# Altium PCB FE1.1S-PCB.PcbDoc
Units mil, origin at the board's own origin, x right, y up, seen from the top; angles counter-clockwise.
Board outline not stored, 4 copper layers (Top Layer, Internal Plane 1, Mid-Layer 1, Bottom Layer), stack 18.2 mil thick; 21 components, 0 nets, 66 pads, 0 vias.
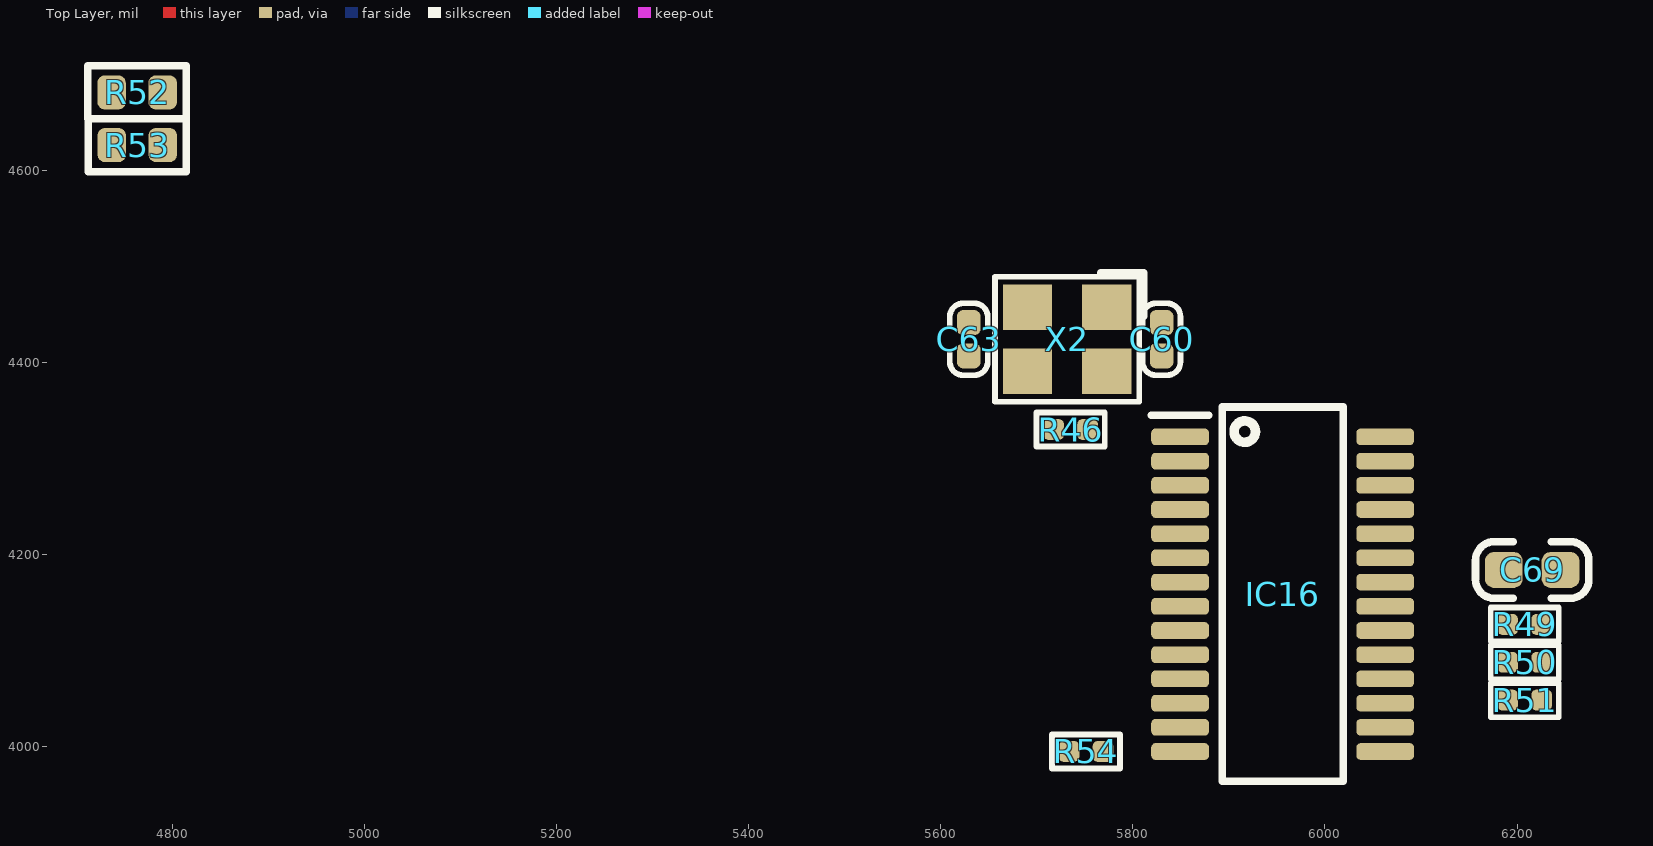
[diagram p0: Top Layer view]
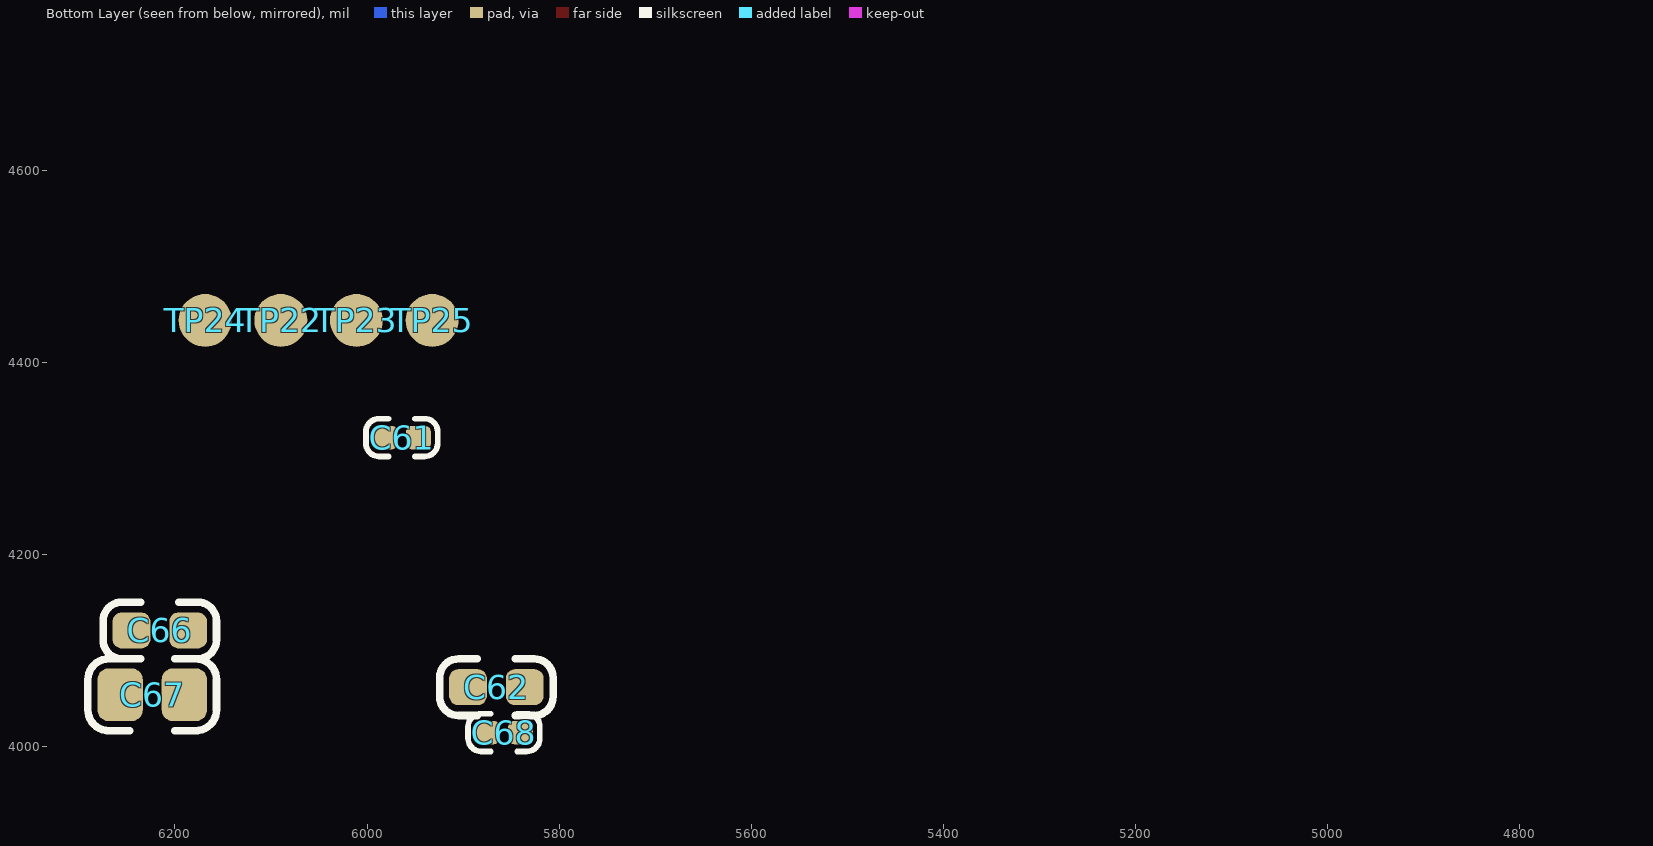
[diagram p1: Bottom Layer view, seen from below]
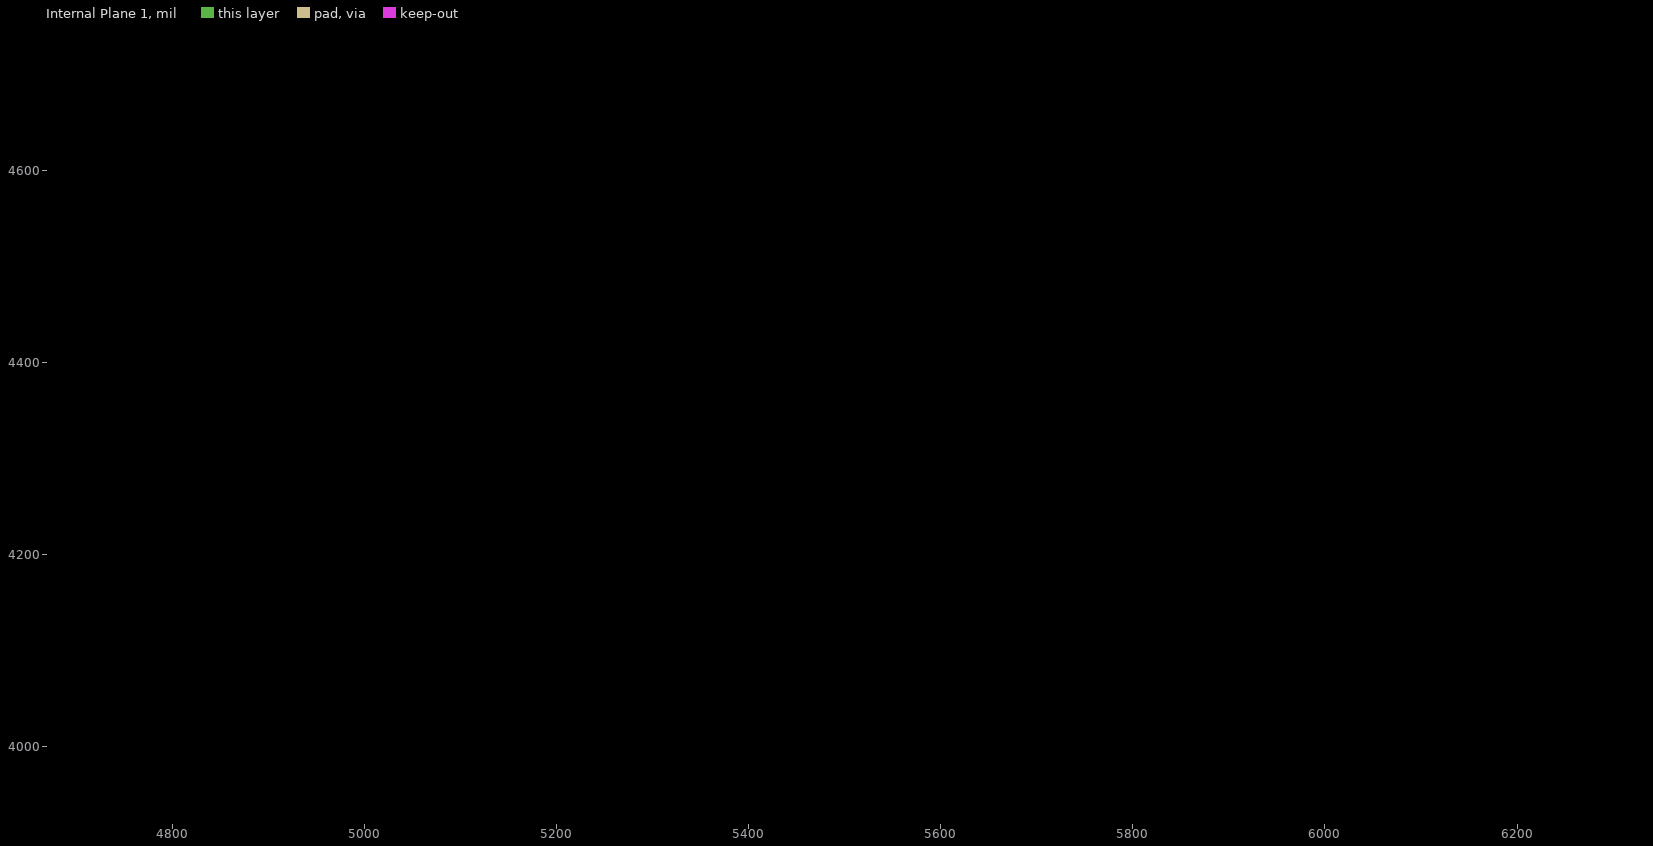
[diagram p2: Internal Plane 1, clearances drawn from the general rule]

## Layer stack, top to bottom
Top Solder: solder mask 0.4, Solder Resist, Dk 3.5
Top Layer: signal copper 1.4
Dielectric 1: dielectric 12.6, FR-4, Dk 4.8
Internal Plane 1: plane copper 1.4
Mid-Layer 1: signal copper 1.4
Bottom Layer: signal copper 1.4
Bottom Solder: solder mask 0.4, Solder Resist, Dk 3.5

## Components (designator, comment, footprint, x,y, rotation, side; value= is the part's Value field where it differs from the comment)
C60 "12pF" C_0402 5829.92,4424.41 r270 top
C61 "100nF" C_0402 5963.78,4322.05 r180 bottom
C62 "10uF" C_0603 5865.35,4062.2 r180 bottom
C63 "12pF" C_0402 5629.13,4424.41 r270 top
C66 "10uF" C_0603 6215.75,4121.26 r180 bottom
C67 "22uF" C_0805 6223.62,4054.33 r0 bottom
C68 "100nF" C_0402 5857.48,4014.96 r180 bottom
C69 "10uF" C_0603 6215.75,4184.25 r0 top
IC16 "FE1.1S" SSOP-28N-150MIL 5955.91,4158.99 r0 top
R46 "1mΩ" R_0402 5735.2,4330.45 r0 top
R49 "10kΩ" R_0402 6207.87,4127.49 r0 top
R50 "10kΩ" R_0402 6207.87,4088.12 r0 top
R51 "10kΩ" R_0402 6207.87,4048.75 r0 top
R52 "0Ω" R_0603 4763.34,4681.39 r0 top
R53 "0Ω" R_0603 4763.51,4626.56 r0 top
R54 "2.7kΩ" R_0402 5751.18,3995.28 r0 top
TP22 "TP" TP1.4mm 6089.76,4444.09 r0 bottom
TP23 "TP" TP1.4mm 6011.02,4444.09 r0 bottom
TP24 "TP" TP1.4mm 6168.5,4444.09 r0 bottom
TP25 "TP" TP1.4mm 5932.28,4444.09 r0 bottom
X2 "12Mhz/20pF" XTAL_3225-4P 5731.5,4424.41 r180 top

## Footprints (in the part's own frame and the unit in brackets; to place one, negate y for a bottom-side part, rotate by r counter-clockwise, add the part's x,y. Pads: shape width x height; smd on the part's side, far side on the other; paste and mask are expansions set on the pad)
C_0402 [mm] "Chip Capacitor, 2-Leads, Body 1.00x0.50mm, IPC Medium Density"
  rrect50% 0.66x0.62 smd: 1(-0.44,0) 2(0.44,0)
  silkscreen extent -0.95,-0.5 0.95,0.5, body extent -0.52,-0.27 0.53,0.28, height 0.55
C_0603 [mm] "Chip Capacitor, 2-Leads, Body 1.60x0.80mm, IPC Medium Density"
  rrect50% 1x0.95 smd: 1(-0.75,0) 2(0.75,0)
  silkscreen extent -1.5,-0.75 1.5,0.75, body extent -0.8,-0.4 0.8,0.4, height 0.87
C_0805 [mm] "Chip Capacitor, 2-Leads, Body 2.00x1.25mm, IPC Medium Density"
  rrect50% 1.2x1.4 smd: 1(-0.85,0) 2(0.85,0)
  silkscreen extent -1.7,-0.95 1.7,0.95, body extent -1,-0.62 1,0.63, height 0.88
R_0402 [mm] "Chip Resistor, 2-Leads, Body 1.00x0.50mm, IPC Medium Density"
  rrect50% 0.55x0.55 smd: 1(-0.45,0) 2(0.45,0)
  silkscreen extent -0.9,-0.45 0.9,0.45, body extent -0.5,-0.27 0.5,0.28, height 0.4
R_0603 [mm] "Chip Resistor, 2-Leads, Body 1.60x0.80mm, IPC Medium Density"
  rrect50% 0.75x0.9 smd: 1(-0.675,0) 2(0.675,0)
  silkscreen extent -1.3,-0.7 1.3,0.7, body extent -0.8,-0.42 0.8,0.43, height 0.6
SSOP-28N-150MIL [mm]
  rrect50% 1.525x0.44 smd: 1(-2.712,4.16) 2(-2.712,3.52) 3(-2.712,2.88) 4(-2.712,2.24) 5(-2.712,1.6) 6(-2.712,0.96) 7(-2.712,0.32) 8(-2.712,-0.32) 9(-2.712,-0.96) 10(-2.712,-1.6) 11(-2.712,-2.24) 12(-2.712,-2.88) 13(-2.712,-3.52) 14(-2.712,-4.16) 15(2.712,-4.16) 16(2.712,-3.52) 17(2.712,-2.88) 18(2.712,-2.24) 19(2.712,-1.6) 20(2.712,-0.96) 21(2.712,-0.32) 22(2.712,0.32) 23(2.712,0.96) 24(2.712,1.6) 25(2.712,2.24) 26(2.712,2.88) 27(2.712,3.52) 28(2.712,4.16)
  silkscreen extent -3.47,-4.95 1.6,4.95, body extent -3,-4.95 3,4.95, height 1.75
TP1.4mm [mm]
  round 1.4 smd: 1(0,0)
XTAL_3225-4P [mm]
  rect 1.3x1.2 smd: 1(-1.05,-0.85) 2(1.05,-0.85) 3(1.05,0.85) 4(-1.05,0.85)
  silkscreen extent -2.03,-1.75 1.91,1.65, body extent -1.47,-1.27 1.73,1.23, height 0.7

## Part data
C60 C63: library part Cap_Chip, "贴片电容", Manufacturer_Name=SAMSUNG(三星), Manufacturer_Name_1=YAGEO(国巨), Manufacturer_Part_Number="±5% /25V", Manufacturer_Part_Number_1="±5% /25V"
C61 C62 C66 C67 C68 C69: library part Cap_Chip, "贴片电容", Manufacturer_Name=SAMSUNG(三星), Manufacturer_Name_1=YAGEO(国巨), Manufacturer_Part_Number="±10% /25V", Manufacturer_Part_Number_1="±10% /25V"
IC16: "USB2.0 Hub 4口芯片", LCSC=C9359, Manufacturer_Name=TERMINUS, Manufacturer_Part_Number=FE1.1S-BSOP28BCN
R46 R49 R50 R51 R52 R53 R54: library part Res_Chip, "贴片电阻", Manufacturer_Name=UNI-ROYAL(厚声), Manufacturer_Name_1=YAGEO(国巨), Manufacturer_Part_Number=±1%, Manufacturer_Part_Number_1=±1%
TP22 TP23 TP24 TP25: "测试点"
X2: library part Crystal_4P, "4脚无源晶振"

## Nets (pads, with @x,y where several pads share a name; then routed paths per layer and width w, separated by ;. In a path a pad name is that pad's centre, name@x,y a point inside that pad or via, vN(x,y) a via of type N, cw(c..) or ccw(c..) an arc to the next point about the centre after c; other vN are vias at no path point)
pads on no net: C60.1 C60.2 C61.1 C61.2 C62.1 C62.2 C63.1 C63.2 C66.1 C66.2 C67.1 C67.2 C68.1 C68.2 C69.1 C69.2 IC16.1 IC16.2 IC16.3 IC16.4 IC16.5 IC16.6 IC16.7 IC16.8 IC16.9 IC16.10 IC16.11 IC16.12 IC16.13 IC16.14 IC16.15 IC16.16 IC16.17 IC16.18 IC16.19 IC16.20 IC16.21 IC16.22 IC16.23 IC16.24 IC16.25 IC16.26 IC16.27 IC16.28 R46.1 R46.2 R49.1 R49.2 R50.1 R50.2 R51.1 R51.2 R52.1 R52.2 R53.1 R53.2 R54.1 R54.2 TP22.1 TP23.1 TP24.1 TP25.1 X2.1 X2.2 X2.3 X2.4